# Altium PCB 7-segmentPCB.PcbDoc
Units mil, origin at the board's own origin, x right, y up, seen from the top; angles counter-clockwise.
Board outline 2992.13 x 3385.83 mil, 2 copper layers (Top Layer, Bottom Layer); 43 components, 55 nets, 192 pads, 35 vias.
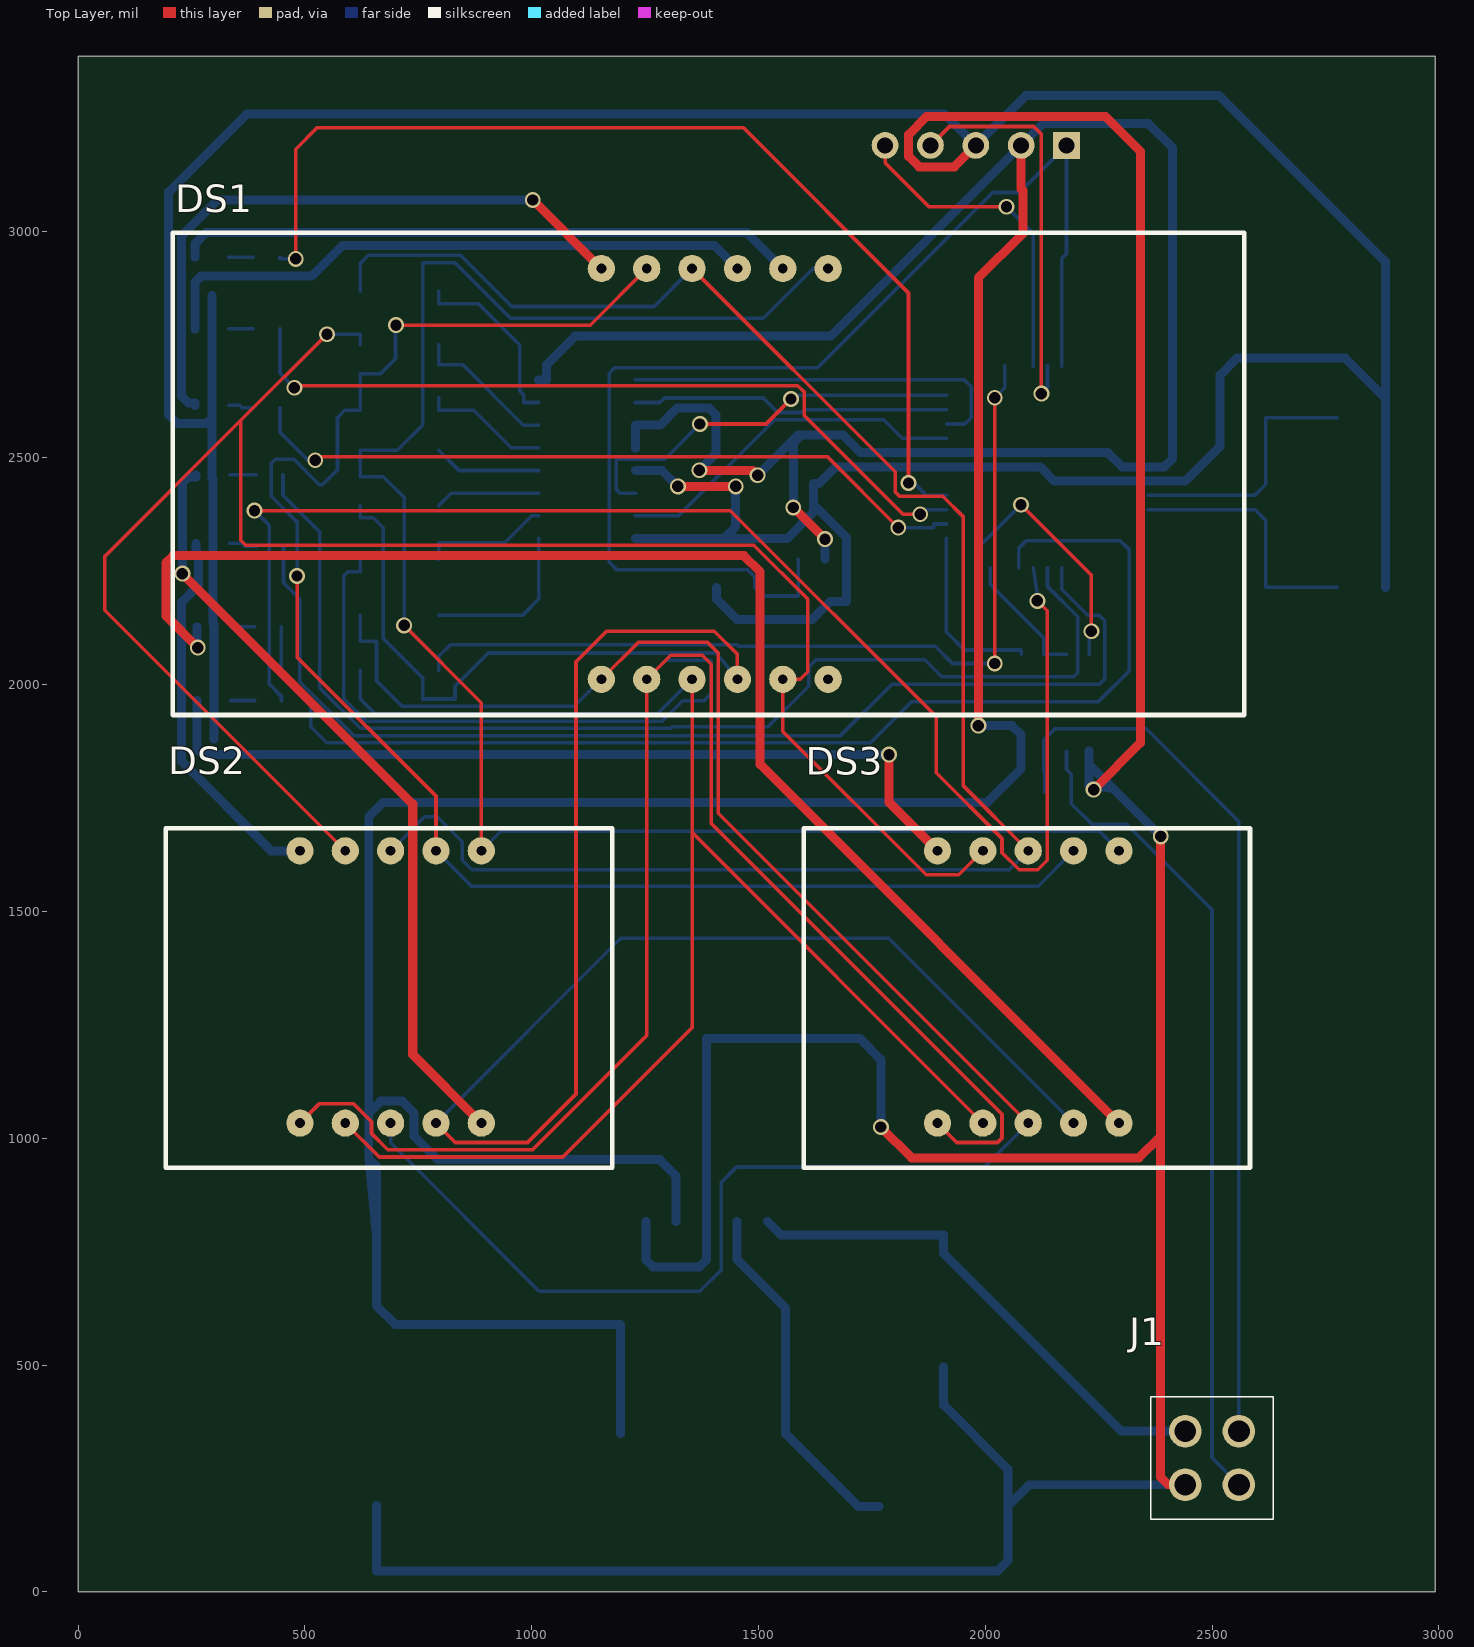
[diagram p0: Top Layer view]
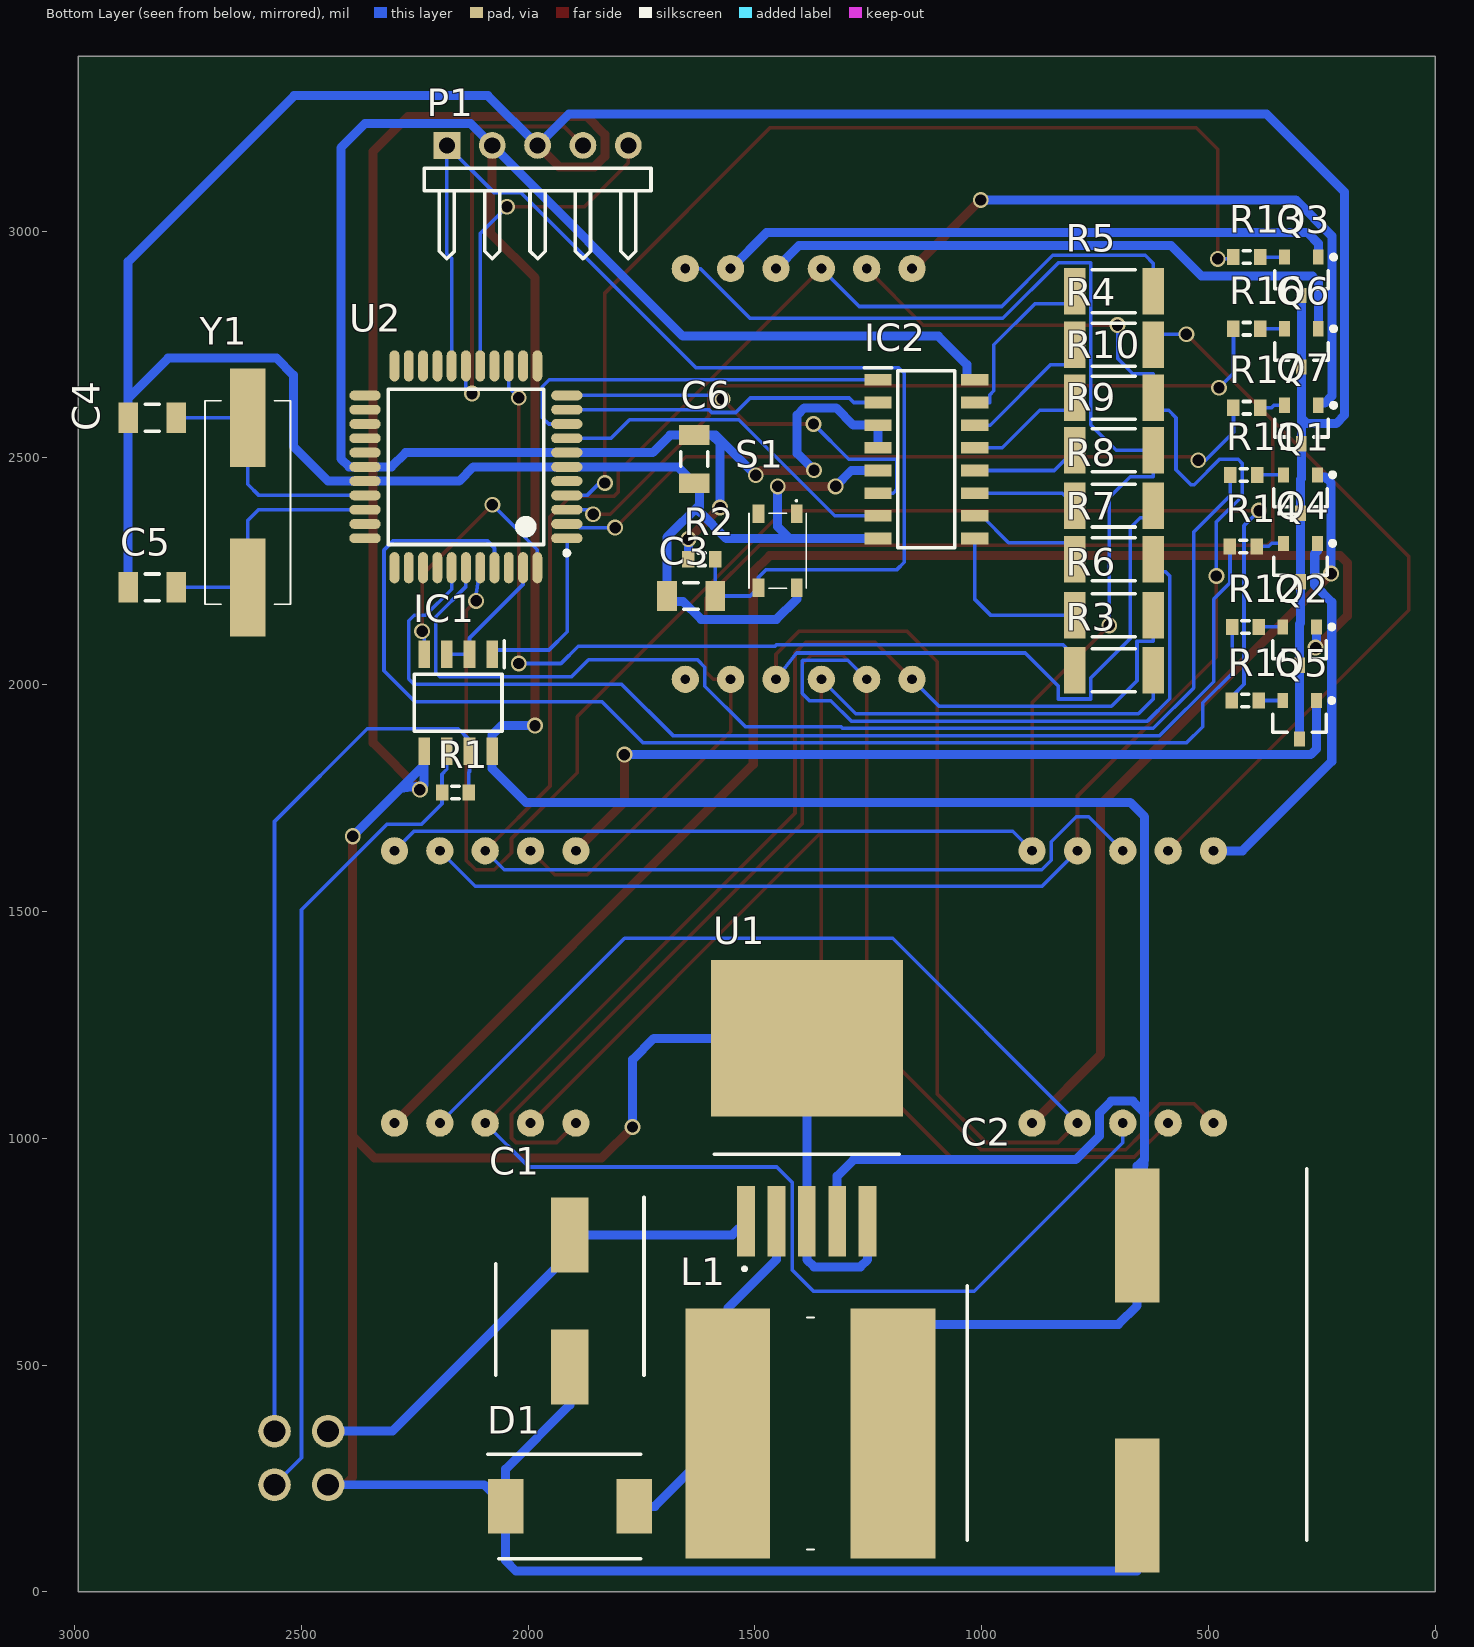
[diagram p1: Bottom Layer view, seen from below]

## Layer stack, top to bottom
Top Solder: solder mask 0.4, Solder Resist, Dk 3.5
Top Layer: signal copper 1.4
Dielectric 1: dielectric 12.6, FR-4, Dk 4.8
Bottom Layer: signal copper 1.4
Bottom Solder: solder mask 0.4, Solder Resist, Dk 3.5

## Board outline
0,3385.83 2992.13,3385.83 2992.13,0 2952.76,0 1574.8,0 0,0

## Design rules (kind name [scope] priority, off if disabled: settings)
Clearance Clearance_Plane [InNetClass('All Nets') vs InNamedPolygon('Top_plane') + InNamedPolygon('Bottom_plane')] p1: gap=10 ignorepadtopadclearanceinfootprint=FALSE
Clearance Clearance_Board_Keepout [OnLayer('KeepOutLayer')] p2: gap=8 ignorepadtopadclearanceinfootprint=FALSE
Clearance Minimum_pad_component_clearcance [(InPadClass('All Pads') AND InComponentClass('All Components')) vs (InPadClass('All Pads') AND InComponentClass('All Components'))] p3: gap=7 ignorepadtopadclearanceinfootprint=FALSE
Clearance Clearance_DiffPairRouting [(IsTrack AND InDifferentialPairClass('All Differential Pairs')) vs (IsTrack AND InDifferentialPairClass('All Differential Pairs'))] p4: gap=8 ignorepadtopadclearanceinfootprint=FALSE
Clearance Clearance_Via_Pad [(IsVia) vs (IsPad)] p5: gap=10 ignorepadtopadclearanceinfootprint=FALSE
Clearance Clearance_Via_Via [(IsVia) vs (IsVia)] p6: gap=10 ignorepadtopadclearanceinfootprint=FALSE
Clearance Clearance_wara_Default [All] p7: gap=8 ignorepadtopadclearanceinfootprint=FALSE
ComponentClearance [All] p1: gap=8 collisioncheckmode=3 verticalgap=8 showdistances=FALSE
DiffPairsRouting [All] p1: maxlimit=10 minlimit=8 mostfreqgap=8 toplayer_minwidth=15 toplayer_maxwidth=15 toplayer_prefwidth=15 bottomlayer_minwidth=15 bottomlayer_maxwidth=15 bottomlayer_prefwidth=15 maxuncoupledlength=500
HoleSize [All] p1: absolutevalues=TRUE maxlimit=260 minlimit=20 maxpercent=80.000 minpercent=20.000
MinimumAnnularRing [All] p1: minimumring=8
MinimumSolderMaskSliver SilkscreenOverComponentPads [All] p2: minsoldermaskwidth=10
PlaneConnect [InNet('GND')] p1: planeconnectstyle=Relief reliefexpansion=20 reliefentries=4 reliefconductorwidth=10 reliefairgap=10
PolygonConnect [All] p1: connectstyle=Relief reliefconductorwidth=12 reliefentries=4 polygonreliefangle="90 Angle" airgapwidth=10
RoutingPriority RoutingPriority_Power [(InNet('VCC_GPS') AND InNet('VCC_GPS_ANT') AND InNet('VBAT') AND InNetClass('Power') AND InNetClass('signal'))] p1: routingpriority=100
RoutingPriority [All] p2 off: routingpriority=50
RoutingVias [All] p1: holewidth=25 width=35 viastyle="Through Hole" minholewidth=20 minwidth=30 maxholewidth=25 maxwidth=35
SolderMaskExpansion [All] p1: expansion=5
UnRoutedNet [All] p1: checkbadconnections=TRUE
Width Width_7Segmemt [InNet('NetDS1_12')+InNet('NetDS1_9')+InNet('NetDS1_8')+InNet('NetDS3_10')+InNet('NetDS3_5')+InNet('NetDS2_10')+InNet('NetDS2_5')] p1: maxlimit=30 minlimit=20 preferedwidth=20
Width Width_Diode [InNet('NetD1_2')] p2 off: maxlimit=50 minlimit=20 preferedwidth=20
Width Width_+24 [InNet('+24V_IN')] p3 off: maxlimit=50 minlimit=20 preferedwidth=20
Width Width_Power [InNet('VDD' )+InNet('VSS' )+InNet('VIN' )+InNet('NetD1_2') + InNet('+24V_IN') + InNet('+24V_PRO') + InNet('VBAT') + InNetClass('+3.3V')] p4: maxlimit=30 minlimit=19.8 preferedwidth=19.8
Width Width_All [All] p5: maxlimit=10 minlimit=8 preferedwidth=8
24 further rules are at their usual default settings.

## Components (designator, comment, footprint, x,y, rotation, side; value= is the part's Value field where it differs from the comment)
C1 "EEH-ZC1V101P" CAPAE830X1050N 1907.89,641.33 r270 bottom
C2 "EEE-TP1H102M" CAPAE1900X1700N 657.45,487.99 r270 bottom
C3 "Cap Semi" C1206 1640.74,2195.67 r180 bottom value=10uF
C4 "Cap Semi" C1206 2828.74,2588.58 r180 bottom value=22pF
C5 "Cap Semi" C1206 2828.74,2214.57 r180 bottom value=22pF
C6 "Cap Semi" C1206 1633.86,2497.24 r90 bottom value=0.1uF
D1 "MBRS540T3G" DIOM7958X256N 1907.89,188.57 r180 bottom
DS1 "7-segment 3 Digit 0.8\"" "7-segment 3Digit" 1153.54,2011.93 r0 top
DS2 "7-segment 2 Digit 0.56\"" "7-segment 2Digit" 488.98,1033.46 r0 top
DS3 "7-segment 2 Digit 0.56\"" "7-segment 2Digit" 1894.64,1033.46 r0 top
IC1 "MAX485CSA+" SOIC127P600X175-8N 2154.13,1960.16 r270 bottom
IC2 "MC14511BDG" SOIC127P600X175-16N 1122.05,2497.24 r180 bottom
J1 "3-794630-4" 37946304 2559.06,236.22 r270 top
L1 "SDR1307A-101K" SDR1307A101K 1377.76,349.16 r0 bottom
P1 "Header 5H" HDR1X5H 2179.14,3188.98 r180 bottom
Q1 "QNPN" SOT-23B_L 297.21,2420.27 r270 bottom
Q2 "QNPN" SOT-23B_L 299.18,2085.23 r270 bottom
Q3 "QNPN" SOT-23B_L 295.28,2900.38 r270 bottom
Q4 "QNPN" SOT-23B_L 297.21,2269.28 r270 bottom
Q5 "QNPN" SOT-23B_L 299.18,1922.82 r270 bottom
Q6 "QNPN" SOT-23B_L 295.28,2742.5 r270 bottom
Q7 "QNPN" SOT-23B_L 295.28,2573.61 r270 bottom
R1 "Res3" J1-0603 2160.24,1762.8 r180 bottom value="120 Ohm"
R2 "Res3" J1-0603 1617.12,2276.66 r180 bottom value=10K
R3 "Res3" 12Z-2010 708.66,2031.61 r0 bottom value="160 Ohm"
R4 "Res3" 12Z-2010 708.66,2749.21 r0 bottom value="160 Ohm"
R5 "Res3" 12Z-2010 708.66,2867.32 r0 bottom value="160 Ohm"
R6 "Res3" 12Z-2010 708.66,2153.33 r0 bottom value="160 Ohm"
R7 "Res3" 12Z-2010 708.66,2276.77 r0 bottom value="160 Ohm"
R8 "Res3" 12Z-2010 708.66,2394.88 r0 bottom value="160 Ohm"
R9 "Res3" 12Z-2010 708.66,2516.93 r0 bottom value="160 Ohm"
R10 "Res3" 12Z-2010 708.66,2632.49 r0 bottom value="160 Ohm"
R11 "Res3" J1-0603 422.21,2462.6 r0 bottom value="1K Ohm"
R12 "Res3" J1-0603 418.27,2127.55 r0 bottom value="1K Ohm"
R13 "Res3" J1-0603 415.49,2942.7 r0 bottom value="1K Ohm"
R14 "Res3" J1-0603 423.19,2305.11 r0 bottom value="1K Ohm"
R15 "Res3" J1-0603 418.91,1965.15 r0 bottom value="1K Ohm"
R16 "Res3" J1-0603 415.49,2784.82 r0 bottom value="1K Ohm"
R17 "Res3" J1-0603 415.49,2610.61 r0 bottom value="1K Ohm"
S1 "SKRPANE010" SKRPADE010 1449.8,2300.39 r270 bottom
U1 "LM2576-5.0WU" MICROCHIP_TO-263 1385.63,1310.2 r90 bottom
U2 "PIC16F877A-I/PT" TQFP-PT44_N 2137.16,2480.32 r0 bottom
Y1 "ECS-040-18-5PX-JES-TR" ECS49205PXTR 2618.11,2401.57 r270 bottom

## Footprints (in the part's own frame and the unit in brackets; to place one, negate y for a bottom-side part, rotate by r counter-clockwise, add the part's x,y. Pads: shape width x height; smd on the part's side, far side on the other; paste and mask are expansions set on the pad)
"7-segment 2Digit" [mil] "10 pin"
  round 60 hole 21.65: 1(0,0) 2(100,0) 3(200,0) 4(300,0) 5(400,0) 6(400,600.4) 7(300,600.4) 8(200,600.4) 9(100,600.4) 10(0,600.4)
  silkscreen extent -295,-98 689,650, body extent -292,-98 692,650, height 10
"7-segment 3Digit" [mil] "12 pin"
  round 60 hole 21.65: 1(0,0) 2(100,0) 3(200,0) 4(300,0) 5(400,0) 6(500,0) 7(500,905.51) 8(400,905.51) 9(300,905.51) 10(200,905.51) 11(100,905.51) 12(0,905.51)
  silkscreen extent -945,-79 1417,984, body extent -945,-64 1417,984, height 10
12Z-2010 [mm] "Chip Resistor, Body 5.0x2.5mm, IPC High Density"
  rect 1.2x2.6 smd: 1(-2.2,0) 2(2.2,0)
  silkscreen extent -1.2,-1.2 1.2,1.2, body extent -2.58,-1.33 2.58,1.33, height 0.9
37946304 [mm]
  round 1.83 hole 1.22: 1(0,0) 2(0,-3) 3(-3,0) 4(-3,-3)
  silkscreen extent -4.93,-4.93 1.93,1.93, body extent -5,-3.94 5,4.73
C1206 [mm] "Chip Capacitor, Body 3.2x1.6mm, IPC High Density"
  rect 1.1x1.7 smd: 1(-1.35,0) 2(1.35,0)
  silkscreen extent -0.4,-0.75 0.4,0.75, body extent -1.7,-0.9 1.7,0.9, height 1.3
CAPAE830X1050N [mm]
  rect 4.2x2.1 smd: 1(-3.7,0) 2(3.7,0)
  silkscreen extent -5.8,-4.15 4.15,4.15, body extent -5,-4.25 5,4.25, height 10.5
CAPAE1900X1700N [mm]
  rect 7.5x2.5 smd: 1(-7.55,0) 2(7.55,0)
  silkscreen extent -11.3,-9.5 9.5,9.5, body extent -10.5,-9.6 10.5,9.6, height 17
DIOM7958X256N [mm]
  rect 2x3.05 smd: 1(-3.6,0) 2(3.6,0)
  silkscreen extent -4.6,-2.92 3.97,2.92, body extent -3.97,-2.92 3.97,2.92, height 2.56
ECS49205PXTR [mm]
  rect 5.5x2 smd: 1(-4.75,0) 2(4.75,0)
  silkscreen extent -5.7,-2.4 5.7,2.4, body extent -7.3,-2.4 7.3,2.4, height 4.4
HDR1X5H [mm] "Connector; Header; 5 Position; Right Angle"
  rect 1.5x1.5 hole 0.9: 1(0,0)
  round 1.5 hole 0.9: 2(2.54,0) 3(5.08,0) 4(7.62,0) 5(10.16,0)
  silkscreen extent -1.27,-6.35 11.43,-1.27
J1-0603 [mm] "Chip Resistor, Body 1.6x0.8mm, IPC High Density"
  rect 0.7x0.9 smd: 1(-0.75,0) 2(0.75,0)
  silkscreen extent -0.2,-0.35 0.2,0.35, body extent -0.85,-0.48 0.85,0.48, height 0.9
MICROCHIP_TO-263 [mm]
  rect 3.95x1 smd: 1(-12.529,3.404) 2(-12.529,1.702) 3(-12.529,0) 4(-12.529,-1.702) 5(-12.529,-3.404)
  rect 8.75x10.75 smd: 6(-2.279,0)
  silkscreen extent -15.27,-5.18 -8.77,5.18
SDR1307A101K [mm]
  rect 4.75x14 smd: 1(-4.625,0) 2(4.625,0)
  silkscreen extent -0.2,-6.5 0.2,6.5
SKRPADE010 [mm]
  rect 1.05x0.65 smd: 1(-1.95,1.075) 2(2.2,1.075) 3(-1.95,-1.075) 4(2.2,-1.075)
  silkscreen extent -2.72,-1.6 2.23,1.6, body extent -2.41,-1.6 2.66,1.6, height 2.1
SOIC127P600X175-8N [mm]
  rect 1.525x0.65 smd: 1(-2.712,1.905) 2(-2.712,0.635) 3(-2.712,-0.635) 4(-2.712,-1.905) 5(2.712,-1.905) 6(2.712,-0.635) 7(2.712,0.635) 8(2.712,1.905)
  silkscreen extent -3.47,-2.45 1.6,2.58, body extent -3,-2.45 3,2.45, height 1.75
SOIC127P600X175-16N [mm]
  rect 1.525x0.65 smd: 1(-2.712,4.445) 2(-2.712,3.175) 3(-2.712,1.905) 4(-2.712,0.635) 5(-2.712,-0.635) 6(-2.712,-1.905) 7(-2.712,-3.175) 8(-2.712,-4.445) 9(2.712,-4.445) 10(2.712,-3.175) 11(2.712,-1.905) 12(2.712,-0.635) 13(2.712,0.635) 14(2.712,1.905) 15(2.712,3.175) 16(2.712,4.445)
  silkscreen extent -3.48,-4.95 1.6,5.12, body extent -3,-4.95 3,4.95, height 1.75
SOT-23B_L [mm] "SOT23, 3-Leads, Body 2.9x1.3mm, Pitch 0.95mm, Lead Span 2.4mm, IPC High Density"
  rect 0.85x0.6 smd: 1(-1.075,0.95) 2(-1.075,-0.95) 3(1.075,0)
  silkscreen extent -1.2,-1.5 0.7,1.92, body extent -0.7,-1.5 0.7,1.5, height 1.14
TQFP-PT44_N [mm] "Thin QFP, 44-Leads, Body 10x10mm, Pitch 0.8mm, IPC Medium Density"
  oval 1.75x0.55 smd: 1(-5.65,4) 2(-5.65,3.2) 3(-5.65,2.4) 4(-5.65,1.6) 5(-5.65,0.8) 6(-5.65,0) 7(-5.65,-0.8) 8(-5.65,-1.6) 9(-5.65,-2.4) 10(-5.65,-3.2) 11(-5.65,-4) 23(5.65,-4) 24(5.65,-3.2) 25(5.65,-2.4) 26(5.65,-1.6) 27(5.65,-0.8) 28(5.65,0) 29(5.65,0.8) 30(5.65,1.6) 31(5.65,2.4) 32(5.65,3.2) 33(5.65,4)
  oval 0.55x1.75 smd: 12(-4,-5.65) 13(-3.2,-5.65) 14(-2.4,-5.65) 15(-1.6,-5.65) 16(-0.8,-5.65) 17(0,-5.65) 18(0.8,-5.65) 19(1.6,-5.65) 20(2.4,-5.65) 21(3.2,-5.65) 22(4,-5.65) 34(4,5.65) 35(3.2,5.65) 36(2.4,5.65) 37(1.6,5.65) 38(0.8,5.65) 39(0,5.65) 40(-0.8,5.65) 41(-1.6,5.65) 42(-2.4,5.65) 43(-3.2,5.65) 44(-4,5.65)
  silkscreen extent -5.77,-4.35 4.35,4.95, body extent -5,-5 5,5, height 1.2

## Part data
C1: "Capacitor Polarised", Manufacturer_Name=Panasonic, Mouser Part Number=667-EEH-ZC1V101P, Datasheet Link=https://www.mouser.com/datasheet/2/315/ABA0000C1234-1218024.pdf, Height=10.5mm, Manufacturer_Part_Number=EEH-ZC1V101P, Mouser Price/Stock=https://www.mouser.com/Search/Refine.aspx?Keyword=667-EEH-ZC1V101P
C2: "Capacitor Polarised", Manufacturer_Name=Panasonic, Mouser Part Number=667-EEE-TP1H102M, Datasheet Link=https://industrial.panasonic.com/cdbs/www-data/pdf/RDE0000/RDE0000C1255.pdf, Height=17mm, Manufacturer_Part_Number=EEE-TP1H102M, Mouser Price/Stock=https://www.mouser.com/Search/Refine.aspx?Keyword=667-EEE-TP1H102M
C3 C4 C5 C6: "Capacitor (Semiconductor SIM Model)", LatestRevisionDate=29-May-2009, LatestRevisionNote="IPC-7351 Footprint Added.", PackageDescription="Chip Capacitor", PackageReference=C1206, Published=8-Jun-2000, Publisher="Altium Limited"
D1: "Diode", Manufacturer_Name="ON Semiconductor", Mouser Part Number=863-MBRS540T3G, RS Part Number=6880512P, Allied_Number=70100196, Allied Price/Stock=http://www.alliedelec.com/on-semiconductor-mbrs540t3g/70100196/, Datasheet Link=http://www.onsemi.com/pub/Collateral/MBRS540T3-D.PDF, Height=2.56mm, Manufacturer_Part_Number=MBRS540T3G, Mouser Price/Stock=https://www.mouser.com/Search/Refine.aspx?Keyword=863-MBRS540T3G, RS Price/Stock=http://uk.rs-online.com/web/p/products/6880512P
DS1: library part "7-segment 3 Digit"
DS2 DS3: library part "7-segment 2 Digit"
IC1: "Integrated Circuit", Manufacturer_Name="Maxim Integrated", Mouser Part Number=700-MAX485CSA, RS Part Number=5404564P, Datasheet Link=http://datasheets.maximintegrated.com/en/ds/MAX1487-MAX491.pdf, Height=1.75mm, Manufacturer_Part_Number=MAX485CSA+, Mouser Price/Stock=https://www.mouser.com/Search/Refine.aspx?Keyword=700-MAX485CSA, RS Price/Stock=http://uk.rs-online.com/web/p/products/5404564P
IC2: "Integrated Circuit", Manufacturer_Name="ON Semiconductor", Mouser Part Number=863-MC14511BDG, RS Part Number=8063267P, Allied_Number=70466283, Allied Price/Stock=http://www.alliedelec.com/on-semiconductor-mc14511bdg/70466283/, Datasheet Link=http://www.onsemi.com/pub/Collateral/MC14511B-D.PDF, Height=1.75mm, Manufacturer_Part_Number=MC14511BDG, Mouser Price/Stock=https://www.mouser.com/Search/Refine.aspx?Keyword=863-MC14511BDG, RS Price/Stock=http://uk.rs-online.com/web/p/products/8063267P
J1: "Connector", Manufacturer_Name="TE Connectivity", Mouser Part Number=571-3-794630-4, RS Part Number=4959344P, Allied_Number=70285783, Allied Price/Stock=https://www.alliedelec.com/teconnectivity-3-794630-4/70285783/, Datasheet Link=https://www.te.com/commerce/DocumentDelivery/DDEController?Action=showdoc&DocId=Customer+Drawing%7F794630%7FF2%7Fpdf%7FEnglish%7FENG_CD_794630_F2.pdf%7F3-794630-4, Height=9.24mm, Manufacturer_Part_Number=3-794630-4, Mouser Price/Stock=https://www.mouser.com/Search/Refine.aspx?Keyword=571-3-794630-4, RS Price/Stock=http://uk.rs-online.com/web/p/products/4959344P
L1: "Inductor", Manufacturer_Name=Bourns, Mouser Part Number=652-SDR1307A-101K, Datasheet Link=https://componentsearchengine.com/Datasheets/2/SDR1307A-101K.pdf, Height=7mm, Manufacturer_Part_Number=SDR1307A-101K, Mouser Price/Stock=https://www.mouser.com/Search/Refine.aspx?Keyword=652-SDR1307A-101K
P1: "Header, 5-Pin, Right Angle", LatestRevisionDate=17-Jul-2002, LatestRevisionNote="Re-released for DXP Platform.", Publisher="Altium Limited"
Q1 Q2 Q3 Q4 Q5 Q6 Q7: "NPN Bipolar Transistor", LatestRevisionDate=29-May-2009, LatestRevisionNote="IPC-7351 Footprint Added.", PackageDescription="3-Pin SOT-23 Package 0.95 mm Pitch, 2.4 mm Lead Span", PackageReference=SOT-23B, PackageVersion=Aug-1999, Published=8-Jun-2000, Publisher="Altium Limited"
R1 R2 R3 R4 R5 R6 R7 R8 R9 R10 R11 R12 R13 R14 R15 R16 R17: "Resistor", LatestRevisionDate=29-May-2009, LatestRevisionNote="IPC-7351 Footprint Added.", PackageDescription="Chip Resistor", PackageReference=J1-0603, Published=8-Jun-2000, Publisher="Altium Limited"
S1: "Switch", Manufacturer_Name=ALPS, Mouser Part Number=688-SKRPANE010, Datasheet Link=https://www.alps.com/prod/info/E/HTML/Tact/SurfaceMount/SKRP/SKRPANE010.html, Height=2mm, Manufacturer_Part_Number=SKRPANE010, Mouser Price/Stock=https://www.mouser.com/Search/Refine.aspx?Keyword=688-SKRPANE010
U1: "Undefined or Miscellaneous", Manufacturer_Name=Microchip, Mouser Part Number=998-LM2576-5.0WU, RS Part Number=9101925P, Datasheet Link=http://ww1.microchip.com/downloads/en/DeviceDoc/lm2576.pdf, Manufacturer_Part_Number=LM2576-5.0WU, RS Price/Stock=http://uk.rs-online.com/web/p/products/9101925P
U2: "Enhanced FLASH Microcontroller, 8K (x14-Bit words) FLASH, 368 Bytes RAM, 44-Pin TQFP, Standard VDD Range, Industrial Temperature", Supplier Part Number 1=PIC16F877A-I/PT-ND, Code_JEDEC=MS-026, ComponentAvailability="Unknown. Contact manufacturer to determine status.", ComponentLink1Description=Datasheet, ComponentLink1URL=http://ww1.microchip.com/downloads/en/DeviceDoc/39582b.pdf, ComponentLink2Description="Packaging Specification", ComponentLink2URL=http://www.microchip.com/stellent/groups/techpub_sg/documents/packagingspec/en012702.pdf, ComponentLink3Description="Microchip.com Home", ComponentLink3URL=http://www.microchip.com/, DatasheetVersion="revB, Oct-2003", LatestRevisionDate=29-Jan-2009, LatestRevisionNote="Sch. layout revised. 3D Model Removed.", PackageDescription="44-Lead Plastic Thin Quad Flatpack (PT) - 10x10x1mm Body, 2.00mm [TQFP]", PackageReference=TQFP-PT44, PackageVersion="revBB, Aug-2009", Published=11-Oct-2004, Publisher="Altium Limited", Supplier 1=Digi-Key, Supplier 2=Farnell, Supplier 3=Farnell, Supplier 4=Farnell, Supplier Part Number 2=9761454, Supplier Part Number 3=9771093, Supplier Part Number 4=1528478
Y1: "Crystal or Oscillator", Manufacturer_Name=ECS, Mouser Part Number=520-040-18-5PX-JEST, Datasheet Link=https://ecsxtal.com/store/pdf/csm-7x.pdf, Height=4.3mm, Manufacturer_Part_Number=ECS-040-18-5PX-JES-TR, Mouser Price/Stock=https://www.mouser.com/Search/Refine.aspx?Keyword=520-040-18-5PX-JEST

## Via types
v1: diameter 35, hole 25, Top Layer to Bottom Layer, 35 vias

## Nets (pads, with @x,y where several pads share a name; then routed paths per layer and width w, separated by ;. In a path a pad name is that pad's centre, name@x,y a point inside that pad or via, vN(x,y) a via of type N, cw(c..) or ccw(c..) an arc to the next point about the centre after c; other vN are vias at no path point)
A: DS1.11 DS2.7 DS3.7 R10.1 | length 3684.5
  Top Layer w8: v1(482.74,2239.76) 482.74,2060.76 788.98,1754.53 DS2.7 ; v1(700.74,2792.76) 1128.87,2792.76 DS1.11
  Bottom Layer w8: v1(482.74,2239.76) 482.74,2358.76 425.74,2415.76 425.74,2487.76 434.74,2496.76 475.74,2496.76 531.74,2440.76 538.74,2440.76 571.74,2473.76 571.74,2588.76 587.74,2604.76 622.05,2604.76 R10.1 622.05,2685.76 666.74,2685.76 699.74,2718.76 699.74,2791.76 v1(700.74,2792.76) ; DS2.7 867.07,1555.76 2116.54,1555.76 DS3.7
AA: IC2.13 R10.2 | length 281.9
  Bottom Layer w8: R10.2 795.27,2604.76 872.22,2604.76 954.74,2522.25 IC2.13
B: DS1.7 DS2.6 DS3.6 R9.1 | length 3973.2
  Top Layer w8: v1(718.74,2130.76) 888.98,1960.53 DS2.6
  Bottom Layer w8: R9.1 R9.1@622.05,2516.76 ; v1(718.74,2130.76) 718.74,2412.76 672.74,2458.76 622.05,2458.76 R9.1@622.05,2516.76 ; DS2.6 931.88,1676.76 2251.73,1676.76 DS3.6 ; DS1.7 1620.41,2917.44 1510.74,2807.76 953.48,2807.76 830.74,2930.51 759.65,2930.51 759.65,2572.76 703.65,2516.76 R9.1@622.05,2516.76
BB: IC2.12 R9.2 | length 238.5
  Bottom Layer w8: R9.2 839.95,2472.25 IC2.12
C: DS1.4 DS2.4 DS3.4 R8.1 | length 4807.5
  Top Layer w8: DS2.4 831.68,990.76 990.74,990.76 1097.74,1097.76 1097.74,2050.76 1164.74,2117.76 1402.74,2117.76 1453.54,2066.96 DS1.4
  Bottom Layer w8: R8.1 622.05,2367.76 650.74,2367.76 672.74,2345.76 672.74,2101.76 759.65,2014.85 759.65,1968.42 830.9,1968.42 830.9,1996.76 904.06,2069.92 1407.92,2069.92 DS1.4 ; DS2.4 1196.28,1440.76 1787.34,1440.76 DS3.4
CC: IC2.11 R8.2 | length 231.3
  Bottom Layer w8: R8.2 822.64,2422.25 IC2.11
D: DS1.2 DS2.1 DS3.1 R7.1 | length 4801.4
  Top Layer w8: DS2.1 531.28,1075.76 607.74,1075.76 646.74,1036.76 646.74,1010.76 682.74,974.76 1001.74,974.76 1253.54,1226.57 DS1.2 1306.38,2064.76 1375.74,2064.76 1395.54,2044.96 1395.54,1693.96 2036.74,1052.76 2036.74,1000.76 2026.74,990.76 1937.34,990.76 DS3.1
  Bottom Layer w8: R7.1 622.05,2248.76 594.74,2248.76 585.74,2239.76 585.74,1968.76 634.69,1919.81 1287.79,1919.81 1332.74,1964.76 1379.74,1964.76 1395.74,1980.76 1395.74,2052.92 1394.74,2053.92 1295.54,2053.92 DS1.2
DD: IC2.10 R7.2 | length 280.6
  Bottom Layer w8: R7.2 795.27,2312.76 940.74,2312.76 1000.22,2372.25 IC2.10
DP: DS1.3 DS2.2 DS3.2 R3.1 | length 3428.3
  Top Layer w8: DS2.2 663.68,958.76 1068.74,958.76 1353.54,1243.57 1353.54,1674.56 ; DS1.3 1353.54,1674.56 ; DS3.2 1353.54,1674.56
  Bottom Layer w8: R3.1 622.05,1968.33 654.56,1935.81 1277.43,1935.81 DS1.3
E: DS1.1 DS2.3 DS3.3 R6.1 | length 4196.5
  Top Layer w8: DS1.1 1235.38,2093.76 1387.7,2093.76 1411.54,2069.92 1411.54,1716.56 DS3.3
  Bottom Layer w8: R6.1 622.05,2095.76 657.74,2095.76 657.74,2008.76 714.08,1952.42 1094.04,1952.42 DS1.1 ; DS2.3 688.98,990.06 1016.28,662.76 1370.74,662.76 1417.74,709.76 1417.74,902.76 1451.74,936.76 1997.94,936.76 DS3.3
EE: IC2.9 R6.2 | length 369.9
  Bottom Layer w8: R6.2 795.27,2152.76 979.74,2152.76 1015.74,2188.76 1015.74,2322.25 IC2.9
F: DS1.10 DS2.8 DS3.8 R5.1 | length 4054.9
  Top Layer w8: DS1.10 1801.24,2469.74 1801.24,2424.76 1810.74,2415.26 1906.25,2415.26 1951.74,2369.77 1951.74,1776.76 DS3.8
  Bottom Layer w8: R5.1 622.05,2928.84 639.71,2946.51 843.16,2946.51 955.9,2833.76 1269.87,2833.76 DS1.10 ; DS2.8 763.88,1708.76 791.88,1708.76 846.74,1653.91 846.74,1612.76 867.74,1591.76 2052.54,1591.76 DS3.8
FF: IC2.15 R5.2 | length 406.8
  Bottom Layer w8: R5.2 795.27,2839.76 882.74,2839.76 973.26,2749.25 973.26,2647.76 982.26,2638.76 982.26,2622.25 IC2.15
G: DS1.5 DS2.9 DS3.9 R4.1 | length 4157.5
  Top Layer w8: v1(548.74,2772.76) 358.74,2582.76 ; DS2.9 58.74,2164.09 58.74,2282.76 358.74,2582.76 ; DS3.9 1941.54,1580.76 1869.54,1580.76 1553.54,1896.76 DS1.5 1591.9,2011.92 1608.74,2028.76 1608.74,2188.76 1489.74,2307.76 369.74,2307.76 358.74,2318.76 358.74,2582.76
  Bottom Layer w8: v1(548.74,2772.76) 622.05,2772.76 R4.1
GG: IC2.14 R4.2 | length 318.8
  Bottom Layer w8: R4.2 795.27,2705.77 847.74,2705.77 981.26,2572.25 IC2.14
NetC4_2: C4.2 U2.30 Y1.1 | length 572.8
  Bottom Layer w8: U2.30 2593.5,2417.32 2618.11,2441.93 Y1.1 C4.2
NetC5_2: C5.2 U2.31 Y1.2 | length 573.4
  Bottom Layer w8: U2.31 2594.48,2385.83 2618.11,2362.2 Y1.2 2696.74,2214.56 C5.2
NetD1_2: D1.2 L1.2 U1.2 | length 785
  Bottom Layer w19.8: U1.2 1452.64,732.76 1559.84,625.56 L1.2 1720.44,188.57 D1.2
NetDS1_8: DS1.8 Q3.1 | length 1368.3
  Bottom Layer w20: Q3.1 257.87,2972.76 281.62,2996.51 1474.47,2996.51 DS1.8
NetDS1_9: DS1.9 Q6.1 | length 1353.2
  Bottom Layer w20: Q6.1 257.87,2887.76 270.87,2900.76 515.24,2900.76 582.98,2968.51 1402.47,2968.51 DS1.9
NetDS1_12: DS1.12 Q7.1 | length 1415.2
  Top Layer w20: v1(1002.22,3068.76) DS1.12
  Bottom Layer w20: Q7.1 257.87,2620.76 243.74,2620.76 227.74,2636.76 227.74,2988.76 307.74,3068.76 v1(1002.22,3068.76)
NetDS2_5: DS2.5 Q1.1 | length 1724.7
  Top Layer w20: v1(229.74,2244.76) 737.74,1736.76 737.74,1184.7 DS2.5
  Bottom Layer w20: v1(229.74,2244.76) 229.74,2444.76 242.74,2457.76 259.81,2457.76 Q1.1
NetDS2_10: DS2.10 Q4.1 | length 841.1
  Bottom Layer w20: Q4.1 259.81,2294.7 265.74,2288.76 265.74,2219.76 228.24,2182.26 228.24,1830.89 425.27,1633.86 DS2.10
NetDS3_5: DS3.5 Q2.1 | length 3137
  Top Layer w20: v1(263.74,2081.76) 193.74,2151.76 193.74,2268.76 209.74,2284.76 1467.74,2284.76 1503.74,2248.76 1503.74,1824.36 DS3.5
  Bottom Layer w20: Q2.1 261.78,2083.73 v1(263.74,2081.76)
NetDS3_10: DS3.10 Q5.1 | length 1893.9
  Top Layer w20: v1(1787.74,1845.77) 1787.74,1740.76 DS3.10
  Bottom Layer w20: Q5.1 261.78,1858.73 274.74,1845.77 v1(1787.74,1845.77)
NetQ1_2: Q1.2 R11.1 | length 58.1
  Bottom Layer w8: Q1.2 362.74,2462.6 R11.1
NetQ2_2: Q2.2 R12.1 | length 52.2
  Bottom Layer w8: Q2.2 R12.1
NetQ3_2: Q3.2 R13.1 | length 53.3
  Bottom Layer w8: Q3.2 358.74,2942.7 R13.1
NetQ4_2: Q4.2 R14.1 | length 61.7
  Bottom Layer w8: Q4.2 360.74,2311.6 367.23,2305.12 R14.1
NetQ5_2: Q5.2 R15.1 | length 52.8
  Bottom Layer w8: Q5.2 R15.1
NetQ6_2: Q6.2 R16.1 | length 53.3
  Bottom Layer w8: Q6.2 R16.1
NetQ7_2: Q7.2 R17.1 | length 55.5
  Bottom Layer w8: Q7.2 355.74,2615.93 361.06,2610.61 R17.1
PGC: P1.5 U2.16 | length 721.7
  Top Layer w8: P1.5 1779.13,3150.31 1875.68,3053.76 v1(2046.74,3053.76)
  Bottom Layer w8: v1(2046.74,3053.76) 2105.66,2994.84 U2.16
PGD: P1.4 U2.17 | length 907.5
  Top Layer w8: P1.4 1920.92,3230.76 2106.74,3230.76 2123.74,3213.76 v1(2123.74,2641.76)
  Bottom Layer w8: v1(2123.74,2641.76) 2137.16,2655.18 U2.17
RA0: IC2.7 U2.8 | length 790.6
  Bottom Layer w8: IC2.7 1323.74,2372.25 1535.7,2584.21 1776.3,2584.21 1817.19,2543.31 U2.8
RA1: IC2.1 U2.9 | length 874.1
  Bottom Layer w8: IC2.1 1953.26,2672.25 1968.74,2656.76 1968.74,2588.76 1954.78,2574.81 U2.9
RA2: IC2.2 U2.10 | length 705.7
  Bottom Layer w8: IC2.2 1282.12,2622.25 1291.94,2632.07 1510.53,2632.07 1542.39,2600.21 1595.29,2600.21 1601.39,2606.3 U2.10
RA3: IC2.6 U2.11 | length 898.6
  Top Layer w8: v1(1370.74,2574.76) 1516.74,2574.76 v1(1571.74,2629.76)
  Bottom Layer w8: IC2.6 1194.74,2422.25 1186.74,2430.25 1186.74,2497.25 1293.22,2497.25 v1(1370.74,2574.76) ; v1(1571.74,2629.76) 1579.77,2637.8 U2.11
RA4: R3.2 U2.14 | length 1949
  Top Layer w8: v1(2020.74,2046.76) v1(2020.74,2632.76)
  Bottom Layer w8: R3.2 795.27,2062.76 820.27,2087.76 1452.74,2087.76 1455.74,2084.76 1889.74,2084.76 1927.74,2046.76 v1(2020.74,2046.76) ; v1(2020.74,2632.76) 2042.67,2654.69 U2.14
RC5: IC1.2 IC1.3 U2.43 | length 289.8
  Bottom Layer w8: U2.43 2011.17,2220.76 2129.14,2102.8 IC1.2 IC1.3
RD0: R14.2 U2.38 | length 2487.6
  Bottom Layer w8: R14.2 452.72,2224.78 488.74,2188.76 488.74,2006.51 607.44,1887.81 1680.79,1887.81 1794.24,2001.26 2251.74,2001.26 2263.24,2012.76 2263.24,2140.76 2250.77,2153.24 2226.18,2153.24 2168.65,2210.76 U2.38
RD1: R11.2 U2.39 | length 2576.9
  Bottom Layer w8: R11.2 451.73,2417.77 532.74,2336.76 532.74,1992.89 621.82,1903.81 1306.83,1903.81 1310.67,1907.65 1521.63,1907.65 1610.74,1996.76 1610.74,2038.76 1626.74,2054.76 1866.74,2054.76 1904.24,2017.26 2194.74,2017.26 2203.93,2026.46 2203.93,2149.76 2137.16,2216.54 U2.39
RD2: R15.2 U2.40 | length 3273.8
  Top Layer w8: v1(388.74,2383.76) 1437.74,2383.76 1891.74,1929.76 1891.74,1805.76 2036.74,1660.76 2036.74,1629.76 2074.74,1591.76 2115.74,1591.76 2136.74,1612.76 2136.74,2162.76 v1(2114.74,2184.76)
  Bottom Layer w8: v1(388.74,2383.76) 421.74,2350.76 421.74,2000.76 448.44,1974.06 R15.2 ; U2.40 2114.74,2200.69 v1(2114.74,2184.76)
RD3: R12.2 U2.41 | length 2701.1
  Bottom Layer w8: R12.2 447.8,2024.82 512.71,1959.92 512.71,1907.51 548.45,1871.76 1746.74,1871.76 1837.74,1962.76 2249.74,1962.76 2317.74,2030.76 2317.74,2296.76 2296.74,2317.76 2090.74,2317.76 2074.17,2301.19 U2.41
RD4: R17.2 U2.2 | length 1625.2
  Top Layer w8: v1(522.74,2494.76) 530.24,2502.26 1652.24,2502.26 v1(1808.24,2346.26)
  Bottom Layer w8: R17.2 445.02,2556.48 506.74,2494.76 v1(522.74,2494.76) ; v1(1808.24,2346.26) 1886.24,2346.26 1886.24,2354.33 U2.2
RD5: R16.2 U2.3 | length 1734.8
  Top Layer w8: v1(476.74,2654.76) 481.24,2659.26 1586.74,2659.26 1601.24,2644.76 1601.24,2593.26 1818.74,2375.76 v1(1856.74,2375.76)
  Bottom Layer w8: R16.2 445.02,2686.48 v1(476.74,2654.76) ; v1(1856.74,2375.76) 1866.8,2385.83 U2.3
RD6: R13.2 U2.4 | length 2316.2
  Top Layer w8: v1(479.74,2938.76) 479.74,3180.76 526.74,3227.76 1466.74,3227.76 1830.74,2863.76 v1(1830.74,2444.76)
  Bottom Layer w8: R13.2 445.02,2938.76 v1(479.74,2938.76) ; v1(1830.74,2444.76) 1842.74,2444.76 1870.18,2417.32 U2.4
RS485-A: IC1.6 J1.1 R1.1 | length 1819.1
  Bottom Layer w8: IC1.6 2179.14,1813.39 2189.77,1802.76 R1.1 2189.77,1737.74 2234.74,1692.76 2310.74,1692.76 2499.74,1503.76 2499.74,295.53 J1.1
RS485-B: IC1.7 J1.3 R1.2 | length 1984.9
  Bottom Layer w8: R1.2 2130.71,1806.76 2129.14,1808.34 IC1.7 2129.14,1878.16 2153.74,1902.76 2354.74,1902.76 2559.05,1698.45 J1.3
RX: IC1.1 U2.1 | length 398.6
  Bottom Layer w8: U2.1 1913.74,2322.84 1913.74,2116.76 1954.09,2076.42 2079.14,2076.42 IC1.1
TX: IC1.4 U2.44 | length 575.9
  Top Layer w8: v1(2078.74,2396.76) 2233.74,2241.76 v1(2233.74,2117.76)
  Bottom Layer w8: U2.44 1979.68,2297.7 v1(2078.74,2396.76) ; IC1.4 2229.14,2113.16 v1(2233.74,2117.76)
VDD: C2.1 C6.2 IC1.8 IC2.3 IC2.4 IC2.16 L1.1 P1.2 R2.1 U1.4 U2.7 U2.28 | length 10095.2
  Top Layer w19.8: v1(1369.74,2472.76) 1487.14,2472.76 v1(1498.14,2461.76) ; v1(1576.74,2390.76) v1(1646.65,2320.86) ; v1(1984.74,1909.76) 1984.74,2896.76 2082.66,2994.69 2082.66,3089.61 2079.13,3093.14 P1.2
  Bottom Layer w19.8: IC2.16 1032.74,2672.25 1032.74,2705.76 1095.64,2768.67 1658.82,2768.67 P1.2 2126.92,3236.76 2359.74,3236.76 2412.74,3183.76 2412.74,2498.32 2394.74,2480.32 U2.28 2301.74,2480.32 2270.24,2511.81 U2.7 1725.32,2511.81 1686.74,2550.39 C6.2 1594.74,2550.39 ; L1.1 1195.67,589.76 698.74,589.76 657.44,631.06 C2.1 ; IC2.4 IC2.3 1283.22,2572.25 1321.14,2610.17 1390.74,2610.17 1406.74,2594.17 1406.74,2509.76 v1(1369.74,2472.76) ; U1.4 1318.62,916.65 1282.51,952.76 792.74,952.76 740.74,1004.76 740.74,1055.76 714.74,1081.76 666.74,1081.76 640.74,1055.76 ; v1(1498.14,2461.76) 1586.77,2550.39 1594.74,2550.39 ; v1(1576.74,2390.76) 1576.74,2532.39 1594.74,2550.39 ; R2.1 v1(1646.65,2320.86) ; v1(1984.74,1909.76) 2058.74,1909.76 2079.14,1889.37 IC1.8 2079.14,1815.16 2004.74,1740.76 672.74,1740.76 640.74,1708.76 640.74,1055.76 ; 640.74,955.47 640.74,1055.76 ; 640.74,955.47 C2.1 ; 640.74,955.47 657.44,938.76 C2.1
VIN: C1.1 J1.4 U1.1 | length 1137.1
  Bottom Layer w19.8: U1.1 1549.58,787 C1.1 1907.89,745.76 2299.32,354.33 J1.4
VPP: C3.2 P1.1 R2.2 S1.4 U2.18 | length 2666
  Bottom Layer w8: R2.2 C3.2 1510.23,2195.67 S1.4 1492.12,2236.76 1475.12,2253.76 1186.74,2253.76 1170.74,2269.76 1170.74,2686.76 1182.74,2698.76 1630.06,2698.76 2016.38,3085.09 2075.24,3085.09 P1.1 2179.13,2950.24 2168.65,2939.76 U2.18
VSS: C1.2 C2.2 C3.1 C4.1 C5.1 C6.1 D1.1 IC1.5 IC2.5 IC2.8 J1.2 P1.3 Q1.3 Q2.3 Q3.3 Q4.3 Q5.3 Q6.3 Q7.3 S1.2 U1.3 U1.5 U1.6 U2.6 U2.29 | length 16838.4
  Top Layer w19.8: v1(1322.17,2437.34) v1(1449.74,2437.34) ; v1(1769.74,1024.76) 1837.74,956.76 2338.74,956.76 2386.74,1004.76 ; P1.3 1931.7,3141.55 1853.96,3141.55 1830.74,3164.76 1830.74,3212.76 1870.74,3252.76 2264.74,3252.76 2341.74,3175.76 2341.74,1871.76 v1(2238.74,1768.76) ; v1(2386.74,1666.16) v1(2386.74,1665.76) 2386.74,1004.76 ; J1.2 2403.29,236.22 2386.74,252.76 2386.74,1004.76
  Bottom Layer w19.8: Q3.3 Q6.3 295.28,2614.76 295.28,2588.3 ; Q5.3 Q2.3 299.18,2133.76 297.21,2135.73 Q4.3 297.21,2301.76 Q1.3 297.21,2452.76 295.28,2454.7 Q7.3 295.28,2588.3 ; C2.2 657.44,45.76 2026.74,45.76 2049.62,68.64 D1.1 ; IC2.8 1423.22,2322.25 ; IC2.5 1287.26,2472.25 v1(1322.17,2437.34) ; U1.5 1251.62,732.76 1267.62,716.76 1369.63,716.76 1385.63,732.76 U1.3 U1.6 1722.74,1220.47 1769.74,1173.47 v1(1769.74,1024.76) ; S1.2 1407.48,2188.76 1452.48,2143.76 1618.74,2143.76 1658.74,2183.76 1693.89,2183.76 C3.1 1693.89,2324.61 1621.74,2396.76 ; v1(1449.74,2437.34) 1449.74,2348.76 1423.22,2322.25 ; C1.2 1907.89,412.5 2049.62,270.76 D1.1 ; IC1.5 IC1.5@2229.14,1823.76 ; v1(2238.74,1768.76) v1@2229.14,1778.37 ; v1(2386.74,1665.76) 2281.74,1770.76 2239.9,1776.81 v1@2229.14,1778.37 ; v1(2386.74,1666.16) IC1.5@2229.14,1823.76 ; J1.2 2097.27,236.22 D1.1 ; C5.1 C4.1 2881.89,2631.61 ; 295.28,2588.3 282.74,2575.76 218.74,2575.76 199.74,2594.76 199.74,3085.76 371.74,3257.76 1910.35,3257.76 P1.3 2088.92,3298.76 2515.74,3298.76 2881.89,2932.61 2881.89,2631.61 ; 1423.22,2322.25 1563.22,2322.25 1621.74,2380.76 1621.74,2396.76 ; 1621.74,2396.76 1621.74,2444.09 C6.1 1670.08,2480.32 U2.6 2120.74,2480.32 2152.24,2448.82 U2.29 2440.74,2448.82 2517.74,2525.82 2517.74,2682.76 2554.74,2719.76 2793.74,2719.76 2881.89,2631.61 ; v1@2229.14,1778.37 IC1.5@2229.14,1823.76
pads on no net: DS1.6 S1.1 S1.3 U2.5 U2.12 U2.13 U2.15 U2.19 U2.20 U2.21 U2.22 U2.23 U2.24 U2.25 U2.26 U2.27 U2.32 U2.33 U2.34 U2.35 U2.36 U2.37 U2.42